# Altium PCB GateDrivePCB.PcbDoc
Units mil, origin at the board's own origin, x right, y up, seen from the top; angles counter-clockwise.
Board outline 708.66 x 932.09 mil, 2 copper layers (Top Layer, Bottom Layer), stack 65.792 mil thick; 22 components, 15 nets, 53 pads, 92 vias.
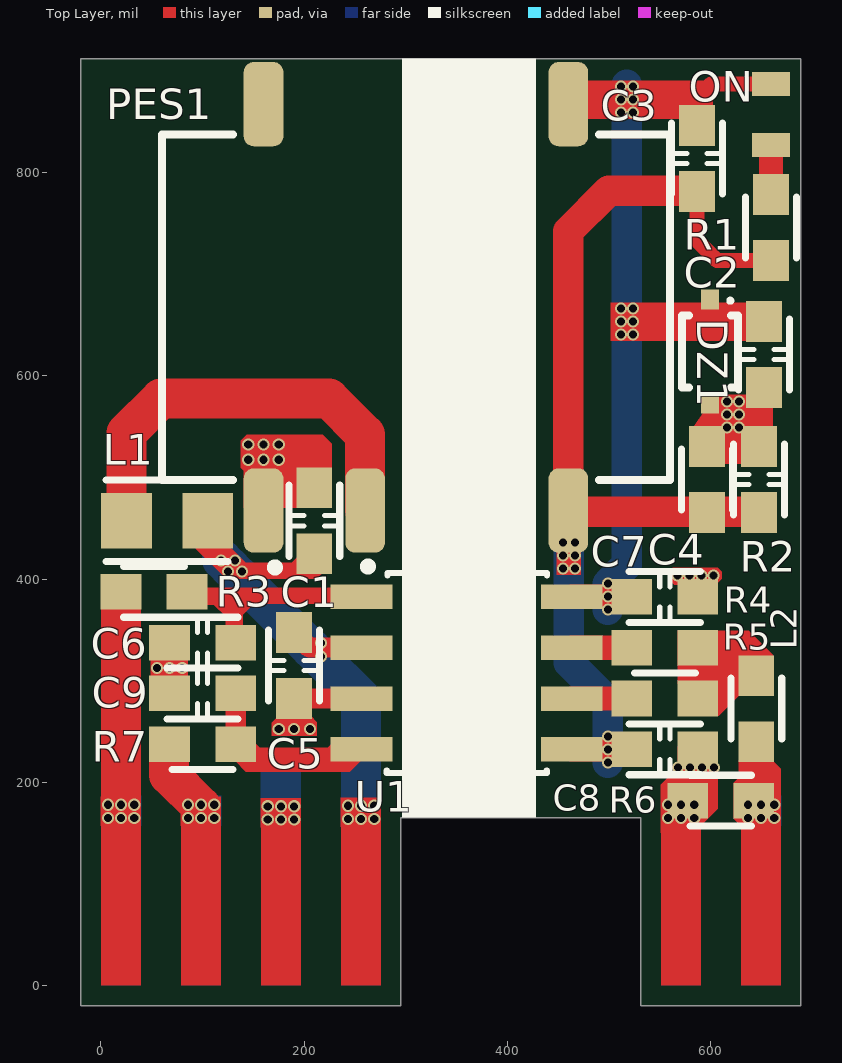
[diagram p0: Top Layer view]
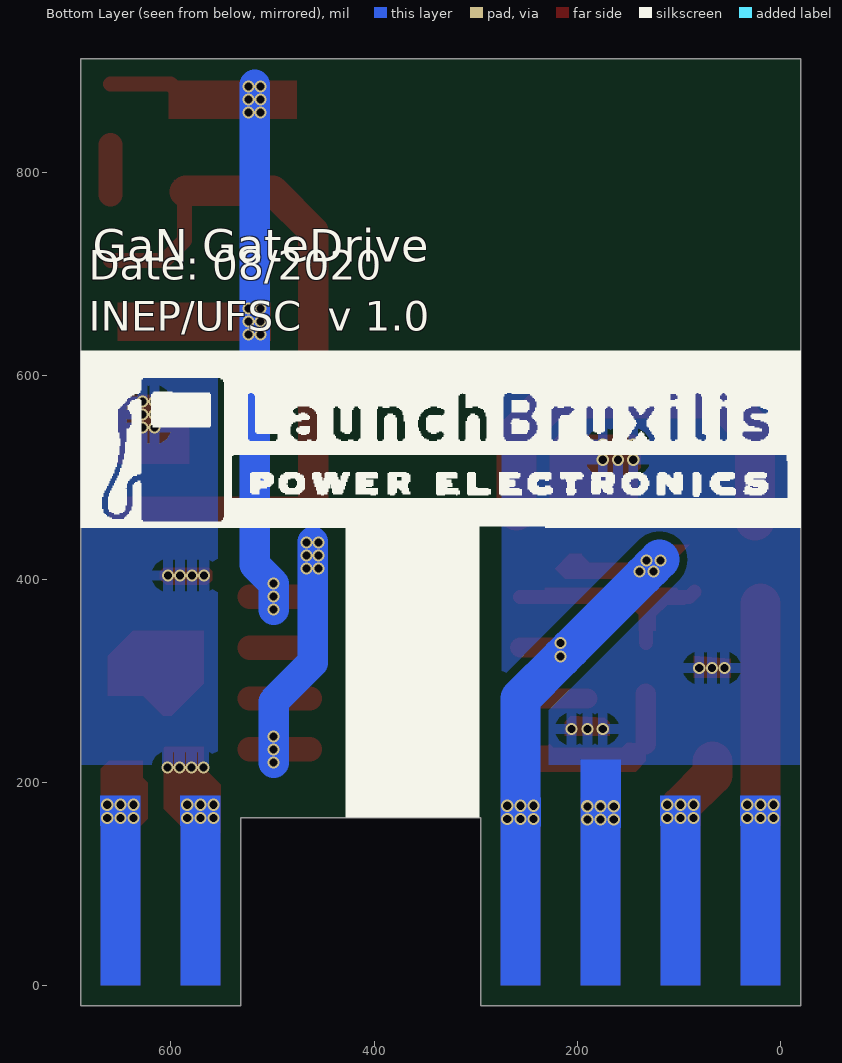
[diagram p1: Bottom Layer view, seen from below]
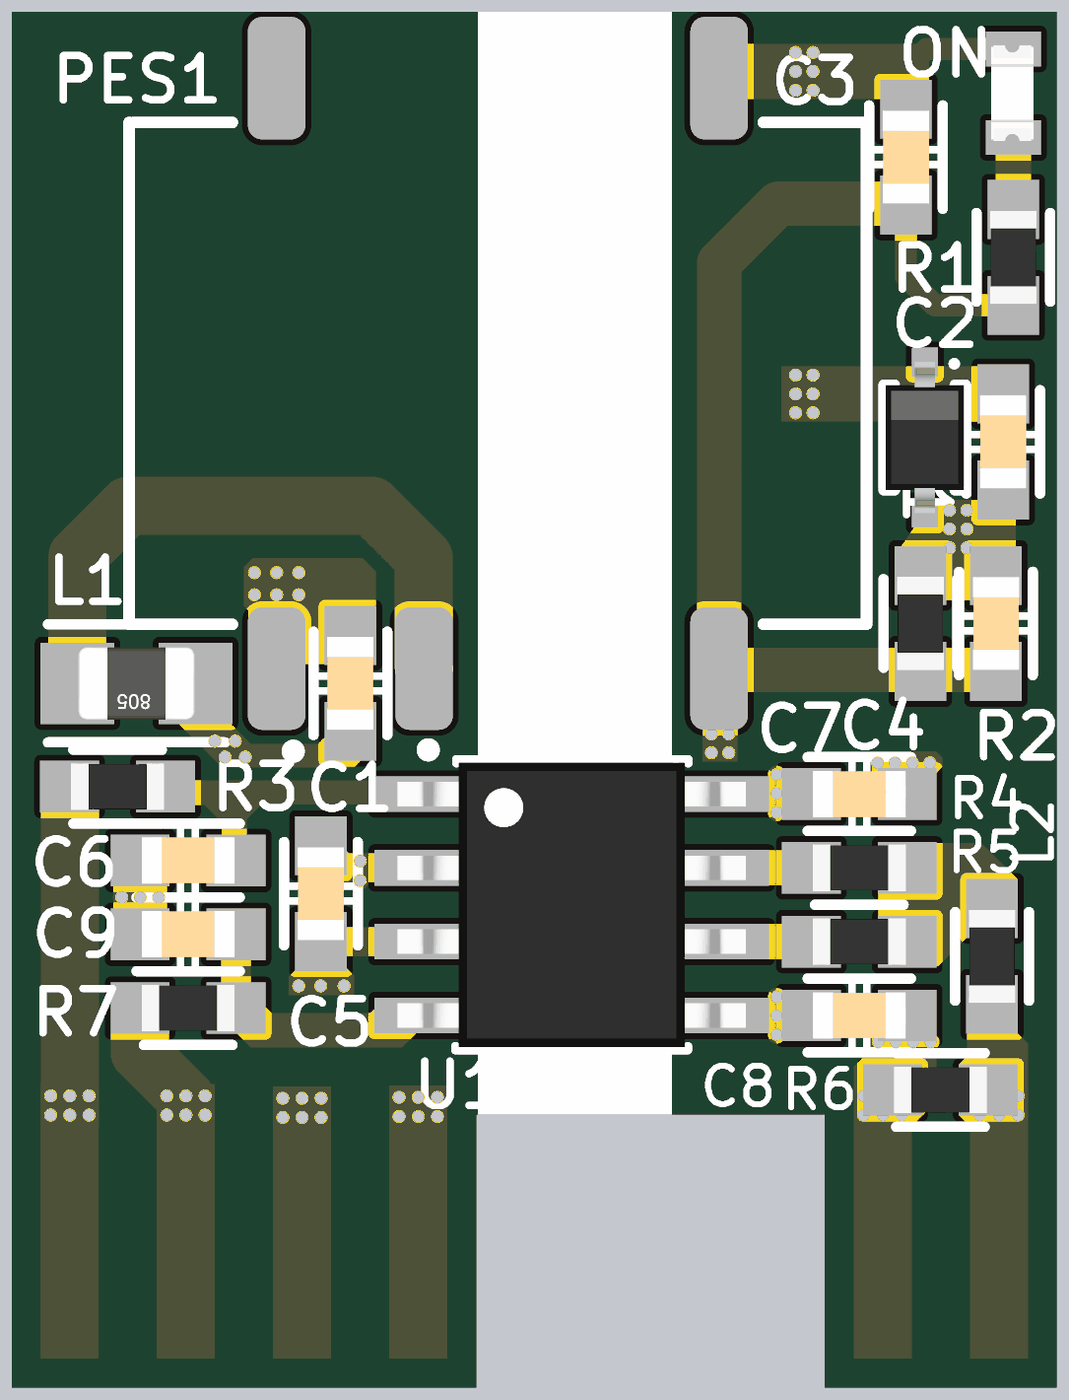
[diagram p2: 3D render of the assembled board from above, using the file's embedded part models]

## Layer stack, top to bottom
Top Solder: solder mask 0.4, Solder Resist, Dk 3.5
Top Layer: signal copper 1.4
Dielectric 1: dielectric 62.9921, FR-4, Dk 4.8
Bottom Layer: signal copper 1.4
Bottom Solder: solder mask 0.4, Solder Resist, Dk 3.5

## Board outline
-19.69,-19.68 -19.69,912.4 688.98,912.4 688.98,-19.68 531.5,-19.68 531.5,165.35 295.28,165.35 295.28,-19.68

## Design rules (kind name [scope] priority, off if disabled: settings)
Clearance [All] p1: gap=8 ignorepadtopadclearanceinfootprint=FALSE except(0: Arc-Text Arc-Hole Track-Text Track-Hole SMDPad-Text SMDPad-Hole THPad-Text THPad-Hole Via-Text Via-Hole Fill-Text Fill-Hole Poly-Text Poly-Hole Region-Text Region-Hole Text-Text Text-Hole)
PolygonConnect [All] p1: connectstyle=Relief reliefconductorwidth=10 reliefentries=4 polygonreliefangle="90 Angle" airgapwidth=10
RoutingVias [All] p1: holewidth=8 width=12 viastyle="Through Hole" minholewidth=7.87 minwidth=11.81 maxholewidth=500 maxwidth=500
SolderMaskExpansion [All] p1: expansion=4
Width [All] p1: maxlimit=2000 minlimit=6 preferedwidth=10 minimp=50.000000 maximp=50.000000 favimp=50.000000
30 further rules are at their usual default settings.

## Components (designator, comment, footprint, x,y, rotation, side; value= is the part's Value field where it differs from the comment)
C1 "0603" 0603C 210,457.48 r270 top value=4.7uF
C2 "0603" 0603C 652.56,621.06 r90 top value="4.7 uF"
C3 "0603" 0603C 586.61,813.98 r90 top value="4.7 uF"
C4 "0603" 0603C 647.64,498.03 r90 top value="4.7 uF"
C5 "0603" 0603C 190,314.98 r90 top value=10uF
C6 "0603" 0603C 100,337.48 r180 top value=100nF
C7 "0603" 0603C 555,382.48 r0 top value=1uF
C8 "0603" 0603C 555,232.48 r0 top value=1uF
C9 "0603" 0603C 100,287.48 r180 top value=100nF
DZ1 "Zener 0.2 W" SODF323 599.41,624.02 r270 top
L1 "0805" 0805 65,457.48 r180 top value="6.8 uH"
L2 "0603" 0603 645,272.48 r270 top value=10R@100Mhz
ON "LED 0603" "LED SMD 0603" 659.45,857.28 r90 top (schematic designator LED1)
PES1 "PES1-S5-S9-M" PES1 310,667.48 r90 top locked
R1 "0603" 0603 659.45,746.06 r270 top value=1k5
R2 "0603" 0603 596.46,498.03 r270 top value=1k
R3 "0603" 0603 52.17,387.48 r0 top value=10k
R4 "0603" 0603 555,332.48 r0 top value=10R
R5 "0603" 0603 555,282.48 r0 top value=2R
R6 "0603" 0603 610,182 r0 top value=3.3k
R7 "0603" 0603 100,237.48 r0 top value=10k
U1 "SI8271" "SOIC 8" 360,307.48 r0 top locked

## Footprints (in the part's own frame and the unit in brackets; to place one, negate y for a bottom-side part, rotate by r counter-clockwise, add the part's x,y. Pads: shape width x height; smd on the part's side, far side on the other; paste and mask are expansions set on the pad)
0603 [mil]
  rect 40x35 smd: 1(-32.5,0) 2(32.5,0)
  silkscreen extent -30,-25 30,25, body extent -31,-16 31,16, height 16
0603C [mil]
  rect 40x35 smd: 1(-32.5,0) 2(32.5,0)
  silkscreen extent -35,-25 35,25, body extent -32,-16 32,16, height 31
0805 [mil]
  rect 50x55 smd: 1(-40,0) 2(40,0)
  silkscreen extent -60,-40 60,40, body extent -39,-25 39,25, height 31
"LED SMD 0603" [mm] "Chip Diode, 2-Leads, Body 2,03x0,80mm, IPC Medium Density"
  rect 0.6x0.95 smd: 1(0.762,0) 2(-0.762,0)
  body extent -0.82,-0.34 0.83,0.89, height 0.68
PES1 [mil]
  rrect50% 83x39 smd: 1(-200,150) 2(-200,50) 4(-200,-150) 5(200,-150) 8(200,150)
  silkscreen extent -260,-250 170,250, body extent -220,-250 220,250, height 276
SODF323 [mm] "SODFL, 2-Leads, Body 1,25x2,50mm, IPC Medium Density"
  rect 0.5x0.45 smd: A(1.3,0) K(-1.3,0)
  silkscreen extent -1.32,-0.7 0.9,0.7, body extent -1.3,-0.67 1.3,0.68, height 1.1
"SOIC 8" [mm] "SOIC 8"
  rect 1.54x0.612 smd: 1(-2.63,1.905) 2(-2.63,0.635) 3(-2.63,-0.635) 4(-2.63,-1.905) 5(2.63,-1.905) 6(2.63,-0.635) 7(2.63,0.635) 8(2.63,1.905)
  silkscreen extent -2.57,-2.5 2.01,2.76, body extent -3,-2.45 3,2.45, height 1.75

## Part data
C1 C2 C3 C4 C5 C6 C7 C8 C9: library part "Capacitor SMD 0603", "Capacitor SMD 0603"
DZ1: library part "Diodo Zener SOD-323", "Zener Diodes ZEN REG 0.2W TR", ComponentLink1Description=Mouser, ComponentLink1URL=https://br.mouser.com/ProductDetail/ON-Semiconductor/SZMM3Z6V2ST1G?qs=%2Fha2pyFaduiqvyw2VWJ9YUoQUF9gtv6XafaMdWM45y6JO%2FkY2hYK5g%3D%3D
L1: library part "Indutor SMD 0805", "Indutor SMD 0805"
L2: library part "Indutor SMD 0603", "Indutor SMD 0603"
ON: library part "LED 0603 SMD", "Typical INFRARED GaAs LED", LatestRevisionDate=08-Jul-2005, LatestRevisionNote="Mech Layer 1 removed.", PackageReference=LED-0, Published=8-Jun-2000, Publisher="Altium Limited"
PES1: library part PES1-M, "Isolated DC/DC Converters 1W 5Vin 9Vout SMT 12-111mA Iso UnReg", ComponentLink1Description=Datasheet, ComponentLink1URL=https://www.cui.com/product/resource/pes1-m.pdf, ComponentLink2Description=PES1-S5-S9-M, ComponentLink2URL=https://br.mouser.com/ProductDetail/CUI-Inc/PES1-S5-S9-M?qs=0OihrS3zgNXlv1CEgF62oQ%3D%3D
R1 R2 R3 R4 R5 R6 R7: library part "Resistor SMD 0603 1/10 W", "Resistor SMD 0603 1/10 W", %=±1%, P=1/8W
U1: library part "CI Driver GaN SI8271", "Gate Drivers Hi CMTI 2.5 kV 3 V UVLO single isolated driver with deglitch", ComponentLink1Description=Mouser, ComponentLink1URL=https://br.mouser.com/ProductDetail/Silicon-Labs/SI8271GBD-IS?qs=r5DSvlrkXmIJOOORsVzmcg%3D%3D

## Via types
v1: diameter 12, hole 8, Top Layer to Bottom Layer, tented both sides, 92 vias

## Nets (pads, with @x,y where several pads share a name; then routed paths per layer and width w, separated by ;. In a path a pad name is that pad's centre, name@x,y a point inside that pad or via, vN(x,y) a via of type N, cw(c..) or ccw(c..) an arc to the next point about the centre after c; other vN are vias at no path point)
+5V: C1.2 C5.2 L1.1 U1.2 | length 382.9
  Top Layer w19.68: C5.2@196.93,340.55 C5.2 190,344.98 197.66,337.32 200.16,337.32 205,332.48 U1.2
  Bottom Layer w39.37: v1@119.09,419.29 125.98,412.4 127.95,410.43 134.84,403.54 206.69,331.69 215.55,322.83 256,282.39 v1(256,177)
  other v1: 243,164 256,164 269,164 243,177 269,177 216.54,323.82 216.54,337.11 125,407.48 138.78,407.48 118.11,418.31 131.89,418.31
+6.2V_SCP: C2.2 C3.2 C7.1 DZ1.K ON.1 PES1.5 U1.8 | length 666.2
  Top Layer w15: 583.66,870.42 600.53,887.28 ON.1
  Top Layer w24: U1.8 C7.1
  Bottom Layer w30: v1(499.02,370.08) v1(499.02,382.87) v1(499.02,395.67) 517.72,414.37 517.72,828.74 517.72,872.05 517.72,886.81
  other v1: 511.81,640.75 523.62,640.75 511.81,653.54 523.62,653.54 511.81,666.34 523.62,666.34 511.81,859.25 523.62,859.25 511.81,872.05 523.62,872.05 511.81,884.84 523.62,884.84
-3V_SCP: C3.1 C4.1 C8.1 PES1.4 R1.2 R2.2 U1.5 | length 1028.6
  Top Layer w15: C3.1 586.61,733.27 606.32,713.56 R1.2
  Top Layer w24: PES1.4 PES1.4@460.97,466.51 ; U1.5 C8.1 ; C4.1@646.66,466.51 C4.1
  Top Layer w30: PES1.4 460,742.48 500,782.48 585.61,782.48 C3.1 ; PES1.4@460.97,466.51 C4.1@646.66,466.51
  Bottom Layer w30: v1@460.63,437.01 460.63,436.02 460.63,317.91 499.02,279.53 v1(499.02,245.08) v1(499.02,232.28) v1(499.02,219.49)
  other v1: 454.72,410.43 466.54,410.43 454.72,423.23 466.54,423.23 454.72,436.02 466.54,436.02
D_SCA: L2.2 R6.2
  other v1: 636.7,164.98 649.7,164.98 662.7,164.98 636.7,177.98 649.7,177.98 662.7,177.98
EN_SCP: R7.1 | length 84.8
  Top Layer w39.37: R7.1@67.19,220.51 67.19,207.42 98.43,176.18 98.43,148.62
  other v1: 85.52,164.98 98.52,164.98 111.52,164.98 85.52,177.98 98.52,177.98 111.52,177.98
GND_D: C1.1 C5.1 C6.2 C9.2 PES1.1 U1.3 | length 66.5
  Top Layer w19.68: C5.1 U1.3
  other v1: 164.17,163.39 177.17,163.39 190.17,163.39 164.17,176.39 177.17,176.39 190.17,176.39 175,252.48 189.96,252.48 205.71,252.48 55,312.48 67.5,312.48 80,312.48 145,517.48 160,517.48 175,517.48 145,532.48 160,532.48 175,532.48
GND_SCP: C2.1 C4.2 C7.2 C8.2 DZ1.A R2.1 R6.1
  other v1: 557.96,164.98 570.96,164.98 583.96,164.98 557.96,177.98 570.96,177.98 583.96,177.98 567.91,214.57 579.72,214.57 591.54,214.57 603.35,214.57 567.42,403.54 579.23,403.54 591.04,403.54 602.85,403.54 616.14,549.21 627.95,549.21 616.14,562.01 627.95,562.01 616.14,574.8 627.95,574.8
NetC6_1: C6.1 R3.2 U1.1 | length 216.7
  Top Layer w14: R3.2 89.67,382.48 120,382.48 132.5,369.98 ; C6.1 132.5,369.98 ; U1.1 145,382.48 132.5,369.98
NetC9_1: C9.1 R7.2 U1.4 | length 67.8
  Top Layer w10: R7.2 R7.2@145.08,224.9
  Top Layer w20: R7.2 C9.1
NetL1_2: L1.2 PES1.2 | length 424.8
  Top Layer w39.37: L1.2 25,543.7 59.06,577.76 224.41,577.76 259.81,542.35 259.81,467.67 PES1.2
NetL2_1: L2.1 R4.2 R5.2
NetLED1_2: ON.2 R1.1 | length 48.7
  Top Layer w24: R1.1 ON.2
NetR4_1: R4.1 U1.7 | length 59
  Top Layer w24: U1.7 R4.1
NetR5_1: R5.1 U1.6 | length 59
  Top Layer w24: U1.6 R5.1
PWM_SCP: R3.1 | length 217.5
  Top Layer w39.37: 19.81,158.46 R3.1@19.81,375.98
  other v1: 6.78,164.98 19.78,164.98 32.78,164.98 6.78,177.98 19.78,177.98 32.78,177.98
pads on no net: PES1.8

## Polygon pours and split planes (outlines as drawn)
GND_D on Bottom Layer "Bottom Layer-GND_D" (solid, pour order 0): 274.61,217.48 274.61,611.22 -19.69,611.22 -19.69,217.48
GND_SCP on Bottom Layer "Bottom Layer-GND_SCP" (solid, pour order 2): 688.98,217.48 688.98,611.22 554.13,611.22 554.13,217.48

## Other copper
Top Layer:
  rectangle net D_SCA: 629.92,0 669.29,157.48
  rectangle net +5V: 236.22,0 275.59,157.48
  rectangle net PWM_SCP: 0,0 39.37,157.48
  rectangle net EN_SCP: 78.74,0 118.11,157.48
  rectangle net GND_D: 157.48,0 196.85,157.48
  rectangle net GND_SCP: 551.18,0 590.55,157.48
  region net D_SCA: 629.92,157.48 629.92,186.02 669.29,186.02 669.29,157.48
  region net GND_SCP: 551.18,157.48 551.18,186.02 590.55,186.02 590.55,157.48
  region net PWM_SCP: 0,157.48 0,186.02 39.37,186.02 39.37,157.48
  region net EN_SCP: 78.74,157.48 78.74,186.02 118.11,186.02 118.11,157.48
  region net NetC9_1: 146.65,239.17 151.57,239.17 156.5,234.25 223.43,234.25 227.36,238.19 229.33,236.22 256.46,236.22 256.46,222.01 245.08,210.63 142.72,210.63 132.5,220.85 132.5,237.48
  region net NetC6_1: 102.36,391.73 232.28,391.73 232.28,375.98 150.59,375.98 139.76,365.16 139.76,349.41 122.81,349.41 122.81,363.41 111.22,375 93.5,375
  region: 659.45,526.57
  region net GND_SCP: 604.88,581.69 661.2,581.69 661.2,513.78 582.03,513.78 582.03,548.23
  region net GND_D: 168.31,258.86 168.31,246.06 212.6,246.06 212.6,259.21 206.38,265.43 173.23,263.78
  region net GND_SCP: 564.07,394.59 559.55,399.11 559.55,407.97 562.99,411.42 607.28,411.42 611.22,407.48 611.22,400.59 605.22,394.59
  region net +6.2V_SCP: 652.56,672.24 652.56,634.84 501.97,634.84 501.97,672.24
  region net -3V_SCP: 472.44,441.93 472.44,404.53 448.82,404.53 448.82,441.93
  region net +6.2V_SCP: 582.03,890.75 596.46,890.75 602.36,878.94 602.36,853.35 476.38,853.35 476.38,890.75
  region net NetL2_1: 637.8,349.41 662.4,324.8 662.4,285.43 627.95,285.43 608.27,265.75 599.41,265.75 567.91,297.24 567.91,349.41
  region net D_SCA: 627.95,221.46 627.95,204.72 623.03,199.8 623.03,164.37 632.87,154.53 666.34,154.53 669.29,157.48 669.29,213.58 661.42,221.46
  region net GND_SCP: 567.91,214.57 551.18,197.83 551.18,150.59 590.55,150.59 590.55,157.48 607.28,174.21 607.28,234.25 606.3,235.24 567.91,235.24
  region net NetC6_1: 154.53,375.98
  region net GND_D: 157.39,155.88 157.39,184.43 196.76,184.43 196.76,155.88
  region net GND_D: 49.21,321.85 49.21,303.15 85.63,303.15 85.63,324.8
  region net GND_D: 140.75,470.47 140.75,506.89 137.8,509.84 137.8,536.42 143.7,542.32 218.5,542.32 227.36,533.46 227.36,470.47
  region net +5V: 122.81,400.81 125,400.59 212.6,400.59 222.44,410.43 207.89,424.98 195.87,424.98 195.87,424.21 187.99,416.34 142.72,416.34 125,434.06 89.56,434.06
  region net +5V: 236.22,156.5 236.22,185.04 275.59,185.04 275.59,156.5
Bottom Layer:
  rectangle net D_SCA: 629.92,0 669.29,157.48
  rectangle net GND_SCP: 551.18,0 590.55,157.48
  rectangle net +5V: 236.22,0 275.59,157.48
  rectangle net PWM_SCP: 0,0 39.37,157.48
  rectangle net EN_SCP: 78.74,0 118.11,157.48
  rectangle net GND_D: 157.48,0 196.85,157.48
  region net D_SCA: 630.02,157.11 669.39,157.11 669.39,187.01 630.02,187.01
  region net GND_SCP: 551.28,157.11 590.65,157.11 590.65,187.01 551.28,187.01
  region net EN_SCP: 78.83,157.11 118.2,157.11 118.2,187.01 78.83,187.01
  region net PWM_SCP: 0.09,157.11 39.46,157.11 39.46,187.01 0.09,187.01
  region net -3V_SCP: 448.82,441.93 448.82,440.94 448.82,404.53 472.44,404.53 472.44,441.93
  region net +6.2V_SCP: 505.91,890.75 505.91,889.76 505.91,853.35 529.53,853.35 529.53,890.75
  region net GND_D: 157.48,155.51 196.85,155.51 196.85,222.44 157.48,222.44
  region net +5V: 236.22,185 236.22,157 275.59,157 275.59,185

## Silkscreen, mask and mechanical layers (free items; w line width, h text height)
Top Overlay:
  rectangle: 296.26,165.35 428.15,912.4
Bottom Overlay:
  drawing of 1435 lines, arcs and shapes, not listed
  text "GaN GateDrive" at 677.17,712.6 h32
  text "Date: 08/2020 / INEP/UFSC  v 1.0" at 681.1,634.84 h50
Mechanical 13:
  the board outline again, w1